# Altium PCB MT-CHARHER  V1.0.0.PcbDoc (part 2 of 2)
Units mm, origin at the board's own origin, x right, y up, seen from the top; angles counter-clockwise.
Board outline 160.02 x 112.01 mm, 2 copper layers (Top Layer, Bottom Layer); 298 components, 195 nets, 918 pads, 681 vias.
Unrouted connection lines stored in the file: 1.
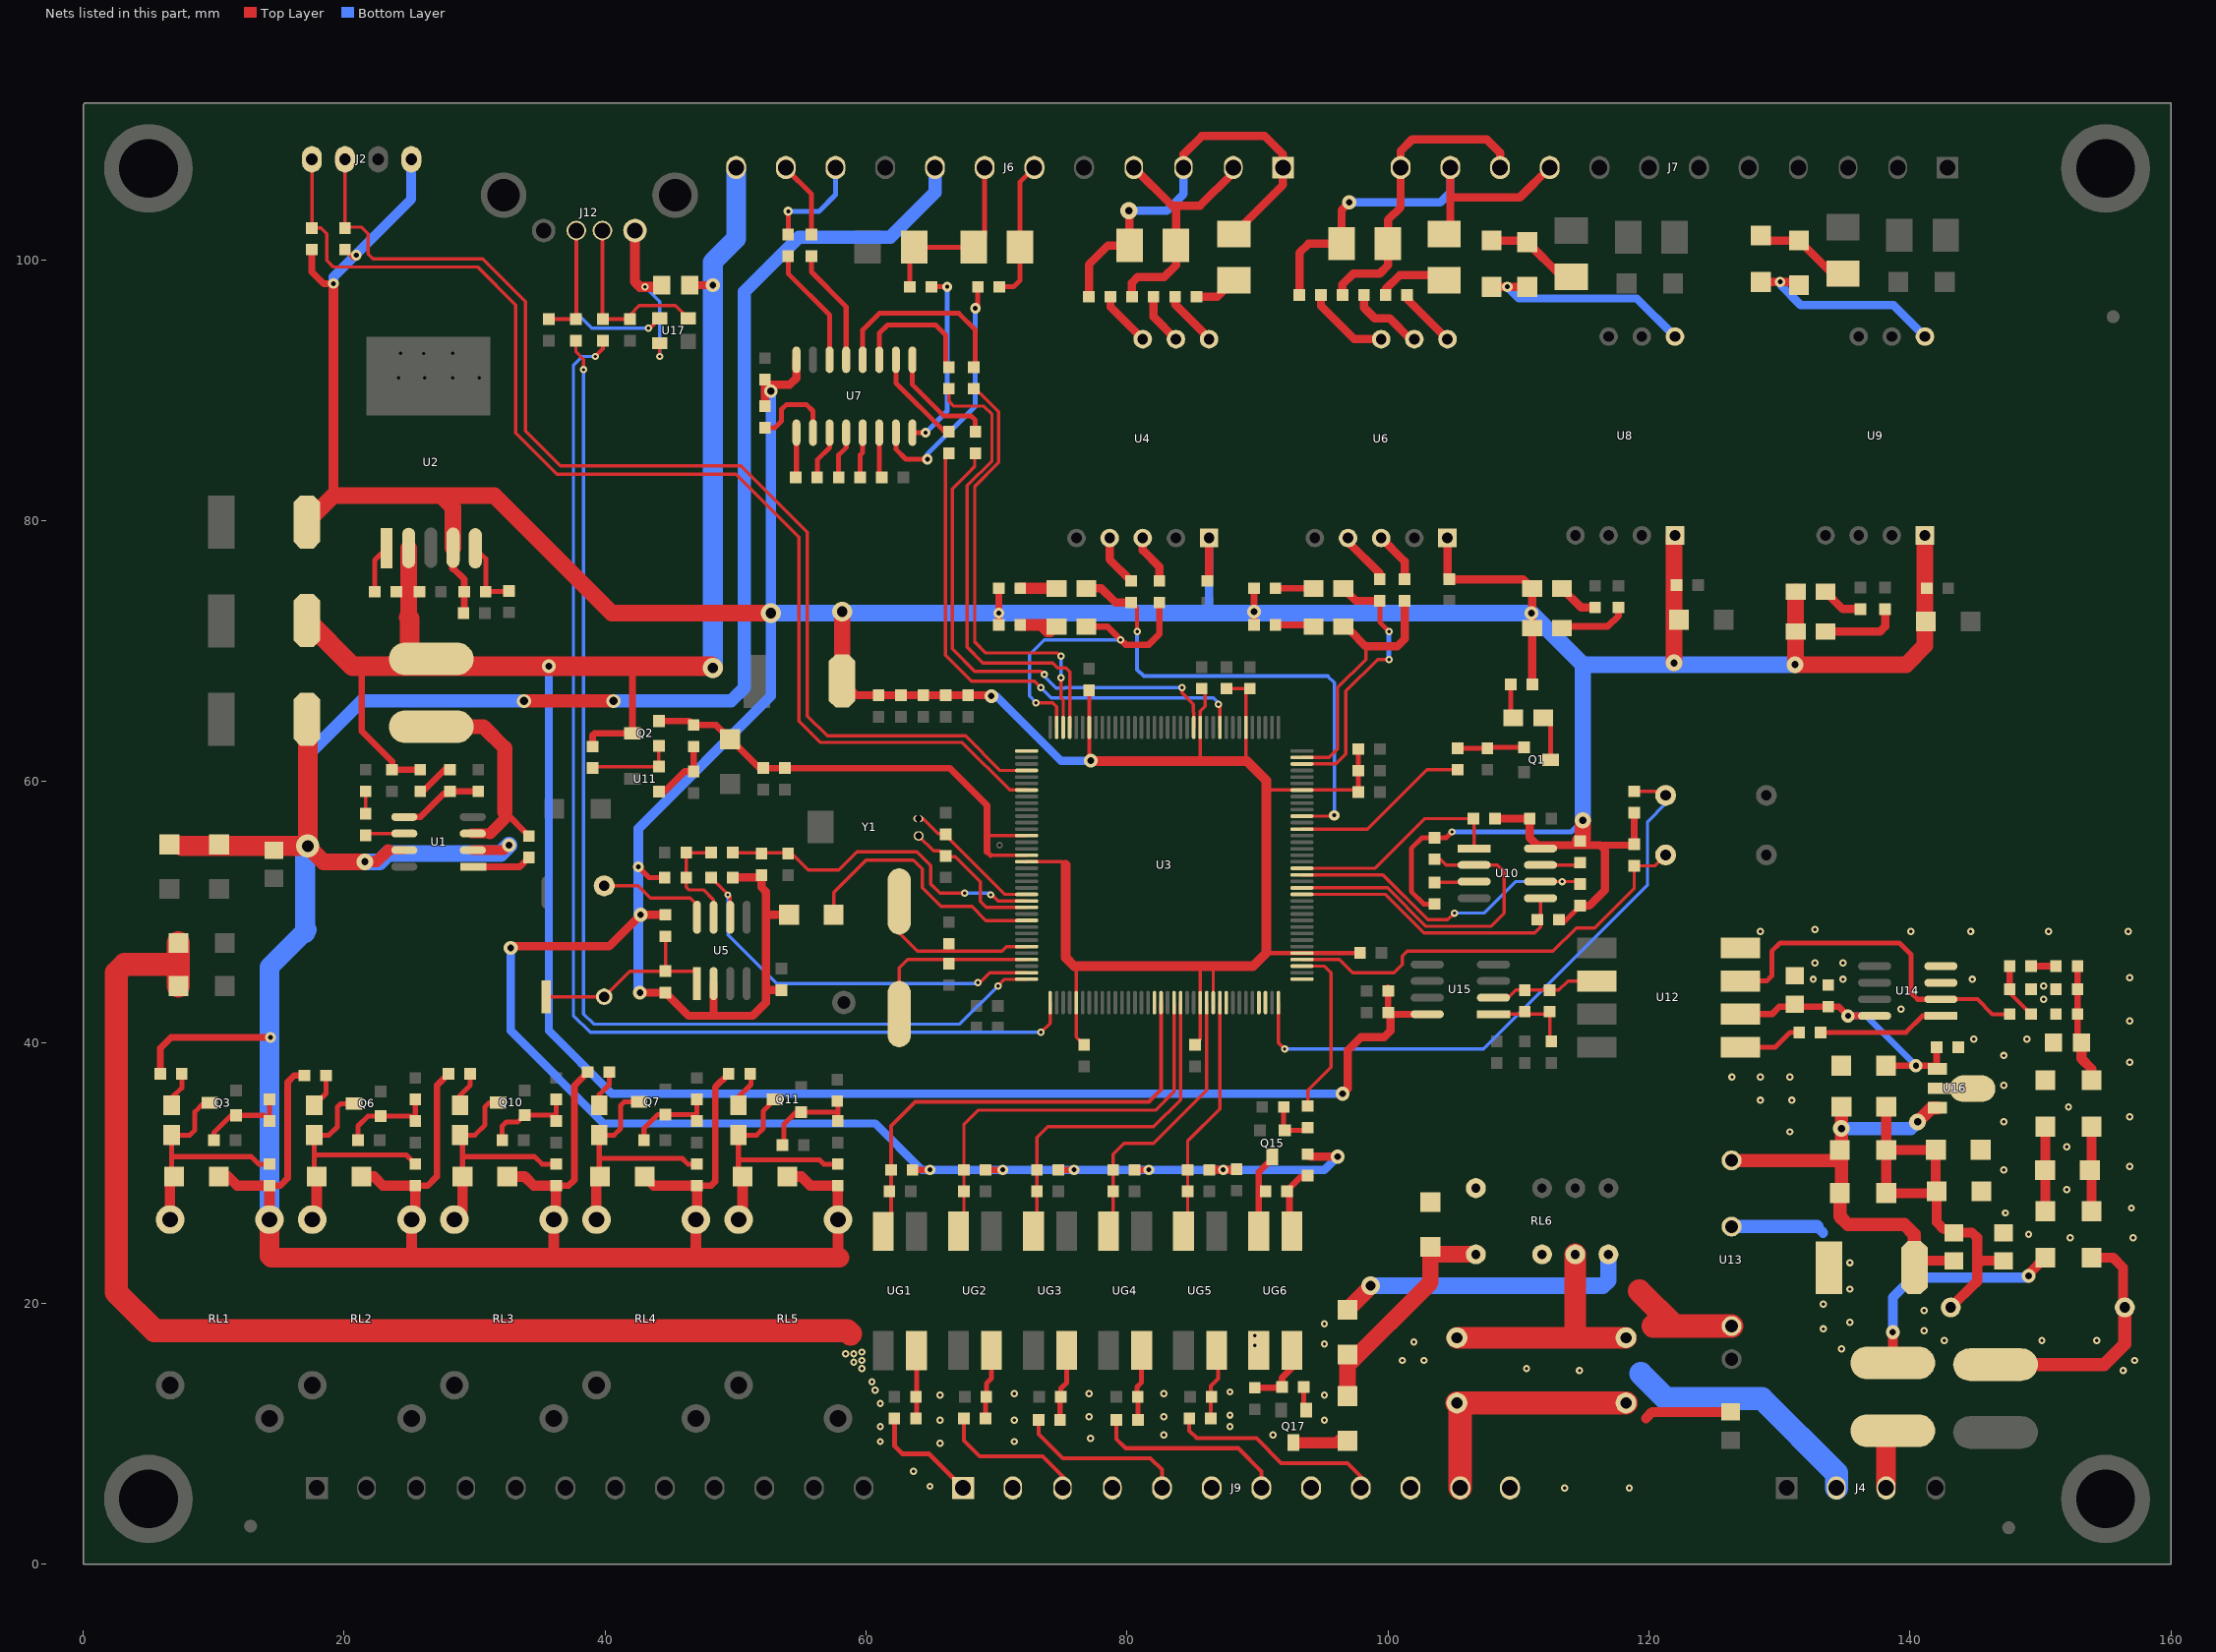
[diagram p2: the nets of this part, all layers, seen from the top]

## Via types
v1: diameter 0.559, hole 0.254, Top Layer to Bottom Layer, 618 vias
v2: diameter 0.813, hole 0.381, Top Layer to Bottom Layer, 19 vias
v3: diameter 1.067, hole 0.508, Top Layer to Bottom Layer, 16 vias
v4: diameter 0.762, hole 0.305, Top Layer to Bottom Layer, 7 vias
v5: diameter 1.27, hole 0.559, Top Layer to Bottom Layer, 6 vias
v6: diameter 1.524, hole 0.813, Top Layer to Bottom Layer, 2 vias
v7: diameter 1.016, hole 0.457, Top Layer to Bottom Layer, 2 vias
v8: diameter 1.067, hole 0.635, Top Layer to Bottom Layer, 2 vias
v9: diameter 1.778, hole 0.914, Top Layer to Bottom Layer, 1 vias
v10: diameter 1.575, hole 0.762, Top Layer to Bottom Layer, 1 vias
v11: diameter 1.016, hole 0.559, Top Layer to Bottom Layer, 1 vias
v12: diameter 1.321, hole 0.711, Top Layer to Bottom Layer, 1 vias
v13: diameter 1.829, hole 1.016, Top Layer to Bottom Layer, 1 vias
v14: diameter 1.422, hole 0.762, Top Layer to Bottom Layer, 1 vias
v15: diameter 0.711, hole 0.305, Top Layer to Bottom Layer, 1 vias
v16: diameter 1.321, hole 0.559, Top Layer to Bottom Layer, 1 vias
v17: diameter 0.813, hole 0.305, Top Layer to Bottom Layer, 1 vias

## Nets (pads, with @x,y where several pads share a name; then routed paths per layer and width w, separated by ;. In a path a pad name is that pad's centre, name@x,y a point inside that pad or via, vN(x,y) a via of type N, cw(c..) or ccw(c..) an arc to the next point about the centre after c; other vN are vias at no path point) (continued)
DP3V3: C1.1 C2.1 C3.1 C4.1 C5.1 C6.1 C7.1 C8.1 C9.1 C10.1 C11.1 C12.2 C13.1 C14.1 C15.1 C16.1 C22.1 C23.1 C24.1 C25.1 C26.1 C32.2 C33.2 C34.1 C35.1 C39.1 C40.2 C41.1 D7.1 D8.1 D9.1 D10.1 D11.1 DC9.1 DC10.1 J2.4 R3.2 R8.2 R9.2 R15.2 R16.2 R18.2 R19.1 R20.1 R21.1 R22.2 R23.2 R30.2 R31.2 R47.1 R48.1 R49.1 R50.1 R52.1 R54.1 R59.2 R66.1 R67.1 R91.1 R92.1 R113.1 R129.1 U2.4 U3.18 U3.41 U3.60 U3.62 U3.77 U3.102 U3.114 U3.121 U3.138 U4.1 U5.2 U6.1 U7.16 U8.1 U9.1 U10.8 | length 601.6
  Top Layer w0.254: U3.18@72.276,53.814 U3.18@72.306,53.844 75.061,53.844 75.311,53.594 ; 75.946,45.847 76.106,45.687 U3.41@76.106,43.044 76.106,40.417 C11.1@76.708,39.814 ; C15.1@85.217,39.814 85.606,40.204 U3.60@85.606,43.044 85.606,45.839 85.598,45.847 ; 85.598,61.561 85.606,61.569 U3.121@85.606,64.144 85.606,65.397 85.979,65.77 85.979,66.865 C7.1@85.725,67.12 ; U3.62@86.606,43.044 86.606,45.839 86.614,45.847 ; C8.1@87.63,67.12 C9.1@89.408,67.12 89.106,66.818 U3.114@89.106,64.144 89.106,61.643 89.188,61.561 ; 90.678,59.436 90.77,59.344 U3.102@93.406,59.344 97.564,59.344 C14.1@97.727,59.182
  Top Layer w0.305: C6.1@77.089,66.739 77.106,66.722 U3.138@77.106,64.144 v3@77.106,61.595 ; 90.678,46.863 90.697,46.844 U3.77@93.406,46.844 C10.1@98.14,46.844
  Top Layer w0.381: R31.2@20.066,100.774 20.701,100.139 20.714,100.139 v2(20.93,100.355) ; v2(42.545,53.467) 43.375,52.637 R20.1@44.565,52.637 ; C14.1@97.727,59.182 C13.1@97.727,60.833 C12.2@97.727,62.484 ; R54.1@103.557,50.609 102.731,50.609 101.779,51.562 101.779,54.864 102.604,55.689 R50.1@103.557,55.689 104.457,55.689 v1(104.902,56.134) ; R49.1@113.347,49.149 113.399,49.149 R48.1@114.733,50.482
  Top Layer w0.508: R30.2@17.526,100.774 17.526,99.06 18.426,98.16 v2@19.166,98.16 ; 28.348,76.352 29.198,75.501 R3.2@29.198,74.549 C22.1@29.198,72.95 ; R66.1@63.563,30.226 v2(64.897,30.226) ; R67.1@69.151,30.226 v2(70.485,30.226) ; R9.2@70.168,72.009 v2(70.168,72.898) R8.2@70.168,74.803 ; R91.1@74.739,30.226 v2(75.946,30.226) ; R92.1@80.581,30.226 v2(81.661,30.226) ; R23.2@89.725,72.009 v3(89.725,73.025) R22.2@89.725,74.803 ; 116.257,55.118 118.808,55.118 R15.2@118.872,55.181 R59.2@118.872,57.594
  Top Layer w0.635: 28.348,76.352 U2.4@28.348,77.923 ; C22.1@29.146,72.898 C22.1@29.198,72.95 ; v3@32.893,47.371 40.311,47.371 v3(42.724,49.784) 42.728,49.78 R18.2@44.629,49.78 ; v3@42.597,43.815 42.601,43.811 C24.1@44.629,43.811 46.403,42.037 48.312,42.037 ; R20.1@44.498,52.705 R20.1@44.565,52.637 ; U5.2@48.312,44.509 48.312,42.037 ; R19.1@49.772,52.637 51.804,52.637 R21.1@51.995,52.828 51.995,51.88 52.324,51.55 52.324,49.784 ; C32.2@52.249,88.773 52.249,89.662 52.249,90.297 52.376,90.424 54.154,90.424 54.662,90.932 U7.16@54.662,92.329 ; 52.376,43.942 52.439,44.005 C25.1@53.519,44.005 ; D9.1@54.09,49.784 52.324,49.784 ; DC10.1@58.166,67.702 59.257,66.611 C1.1@60.96,66.611 C2.1@62.674,66.611 C3.1@64.389,66.611 C4.1@66.103,66.611 C5.1@67.818,66.611 69.532,66.611 v3(69.596,66.548) ; C23.1@86.158,75.374 86.285,75.501 U4.1@86.285,78.664 ; R113.1@86.296,30.226 v2(87.376,30.226) 88.328,30.226 C16.1@88.392,30.29 ; R129.1@93.853,31.432 94.043,31.242 v3(96.139,31.242) ; U6.1@104.556,78.664 104.556,75.645 C26.1@104.7,75.501 108.446,75.501 110.351,75.501 D7.1@111.05,74.803 D8.1@111.05,71.755 111.05,67.449 R16.2@111.061,67.437 ; R52.1@108.192,57.15 C41.1@110.859,57.15 110.859,55.689 U10.8@111.431,55.118 ; U10.8@111.685,54.864 U10.8@111.431,55.118 ; R48.1@114.733,50.482 115.431,50.482 116.638,51.689 116.638,54.737 116.257,55.118 U10.8@111.431,55.118 ; 48.312,42.037 51.308,42.037 52.324,43.053 52.324,49.784
  Top Layer w0.762: 19.166,81.915 v2@19.166,98.16 ; 75.311,53.594 75.311,46.482 75.946,45.847 85.598,45.847 86.614,45.847 89.662,45.847 90.678,46.863 90.678,59.436 90.678,60.071 89.188,61.561 85.598,61.561 v3@77.216,61.561
  Top Layer w1.27: DC9.1@17.145,79.894 19.166,81.915 27.432,81.915 ; U2.4@28.348,77.923 28.348,81.026 28.321,81.026 27.432,81.915 ; v6(52.705,72.898) 40.513,72.898 31.496,81.915 27.432,81.915 ; DC10.1@58.166,67.702 v6(58.166,73.025) ; R47.1@114.733,55.435 114.935,55.638 v5(114.935,57.023) ; v5(121.92,69.088) 121.92,78.798 U8.1@121.989,78.867 ; D10.1@131.243,74.549 131.243,69.013 v5(131.191,68.961) 139.7,68.961 141.149,70.41 U9.1@141.149,78.867
  Bottom Layer w0.381: v1(104.902,56.134) 114.046,56.134 v5(114.935,57.023)
  Bottom Layer w0.635: v3(32.766,47.244) 32.766,40.894 39.878,33.782 60.706,33.782 64.262,30.226 v2(64.897,30.226) v2(70.485,30.226) v2(75.946,30.226) v2(81.661,30.226) v2(87.376,30.226) 95.123,30.226 v3(96.139,31.242) ; v3(69.596,66.548) 69.977,66.548 74.93,61.595 v3(77.216,61.595) ; 86.233,72.898 86.285,72.95 U4.1@86.285,78.664
  Bottom Layer w0.762: v2(19.177,98.171) 19.177,98.679 25.146,104.648 J2.4@25.146,107.696 ; v3(42.672,43.815) 42.545,43.942 v2(42.545,53.467) 42.545,56.388 52.705,66.548 v6(52.705,72.898) v11@52.705,89.789
  Bottom Layer w1.27: v6(52.705,72.898) v2(70.168,72.898) 86.233,72.898 v3(110.998,72.898) 114.935,68.961 ; v5(114.935,57.023) 114.935,68.961 ; v5(131.191,68.961) 114.935,68.961
  other v11: 52.705,89.916
EL1+: DC7.2 DC8.2 J9.11 | length 19.6
  Top Layer w1.8: J9.11@105.537,5.842 105.537,12.105 DC7.2@105.283,12.359 DC8.2@118.237,12.359
FG: J4.3 L7.1 | length 4.6
  Top Layer w1.524: J4.3@138.176,5.842 L7.1@138.176,9.719
  Top Layer w2.032: L7.1@138.176,9.719 L7.1@138.684,10.227
FRAM_CS: R52.2 U3.90 U10.1 | length 17
  Top Layer w0.254: U3.90@93.406,53.344 98.989,53.344 102.795,57.15 R52.2@106.541,57.15 106.605,57.087 U10.1@106.605,54.864
FRAM_MISO: R50.2 U3.87 U10.2 | length 26
  Top Layer w0.254: U3.87@93.406,51.844 99.961,51.844 102.91,48.895 107.875,48.895 108.891,49.911 108.891,53.086 108.383,53.594 U10.2@106.605,53.594 104.446,53.594 104.001,54.038 R50.2@103.557,54.038
FRAM_MOSI: R49.2 U3.86 U10.5 | length 21.9
  Top Layer w0.254: U3.86@93.406,51.344 99.815,51.344 102.772,48.387 111.24,48.387 111.621,48.768 111.685,48.831 U10.5@111.685,51.054
FRAM_SCK: R48.2 U3.89 U10.6 | length 25.7
  Top Layer w0.254: U3.89@93.406,52.844 99.608,52.844 103.049,49.403 104.573,49.403 v1(105.081,49.911) ; U10.6@111.685,52.324 v1(113.336,52.324) 114.542,52.324 R48.2@114.733,52.133
  Bottom Layer w0.254: v1(105.081,49.911) 107.367,49.911 109.78,52.324 v1(113.336,52.324)
FV5V: C69.2 C70.1 C78.2 DC5.1 U12.2 U14.8 U16.1 | length 22.8
  Top Layer w0.508: U12.2@127,42.164 129.413,42.164 129.984,42.735 C69.2@133.731,42.735 134.556,42.735 v7(135.255,42.037) 135.261,42.031 U14.8@137.293,42.031 ; DC5.1@138.174,38.215 v7(140.462,38.215) 141.91,38.215 142.049,38.354 C70.1@142.049,39.624
  Bottom Layer w0.508: v7(135.255,42.037) 136.64,42.037 v7(140.462,38.215)
FV11: C55.1 C71.2 DC3.2 DC4.1 R64.2 R73.2 R74.2 Z1.2 | length 30.5
  Top Layer w0.762: DC3.2@138.184,35.058 R74.2@138.184,31.749 ; Z1.2@141.975,28.65 141.975,31.749 R74.2@138.184,31.749 ; 142.604,25.671 142.049,26.226 Z1.2@142.049,28.575 141.921,28.447 R73.2@138.184,28.447 R74.2@138.184,31.749 ; R64.2@143.256,19.685 R64.2@143.129,19.685 145.034,21.59 145.097,21.59 145.161,21.653 145.161,25.019 144.765,25.415 C55.1@143.366,25.415 ; 145.542,23.241 145.557,23.256 C71.2@147.176,23.256
FV12: C55.2 DC3.1 DC11.1 R73.1 R74.1 U13.7 U16.3 | length 37
  Top Layer w0.762: R73.1@134.628,28.447 R73.1@134.749,28.568 ; 134.655,30.955 134.749,30.861 ; DC11.1@140.335,22.744 140.847,23.256 C55.2@143.366,23.256
  Top Layer w1.016: U13.7@126.33,30.955 134.655,30.955 ; R73.1@134.628,28.447 134.628,26.662 135.255,26.035 139.573,26.035 140.335,25.273 DC11.1@140.335,22.744 ; R73.1@134.749,28.568 134.749,30.861 DC3.1@134.749,35.064 ; v5(140.589,33.909) 141.659,34.979 U16.3@142.119,34.979
  Bottom Layer w1.016: v5(134.747,33.401) 140.081,33.401 v5(140.589,33.909)
FVGND: C58.1 C59.2 C60.2 C69.1 C70.2 C71.1 C78.1 DC4.2 DC5.2 DC11.2 L8.2 R81.1 U12.4 U13.5 U14.3 U14.4 U16.2 Z1.1 | length 7.2
  Bottom Layer w0.762: 132.875,25.875 133.35,25.4
  Bottom Layer w1.016: U13.5@126.33,25.875 132.875,25.875
  other v1: 156.337,14.859 157.226,15.621 134.747,16.51 142.621,17.145 150.114,17.145 154.305,17.145 141.097,17.907 133.35,18.034 135.382,18.542 141.097,19.431 133.35,19.939 135.382,21.082 135.382,23.114 152.273,25.019 157.099,25.019 149.098,25.273 147.32,26.924 156.972,27.305 152.019,28.702 147.193,30.226 156.845,30.48 152.019,32.004 130.81,33.147 147.193,33.909 156.845,34.29 152.146,35.052 128.524,35.56 130.937,35.56 147.193,36.703 126.365,37.338 128.524,37.338 130.81,37.338 156.845,38.481 147.193,38.989 144.907,40.259 148.971,40.259 156.845,41.656 139.319,42.545 150.241,43.307 150.241,44.323 132.588,44.831 134.874,44.831 144.78,44.831 156.845,44.958 132.715,46.101 134.874,46.101 128.524,48.514 140.081,48.514 144.653,48.514 150.622,48.514 156.718,48.514 132.715,48.641
in-ad1: R70.2 U12.3 U14.2 | length 26.9
  Top Layer w0.305: U14.2@142.373,43.301 142.379,43.307 145.161,43.307 146.304,42.164 R70.2@147.637,42.164
  Top Layer w0.381: U12.3@127,44.704 129.032,44.704 129.413,45.085 129.413,46.99 130.048,47.625 139.192,47.625 140.081,46.736 140.081,43.815 140.595,43.301 U14.2@142.373,43.301
ISP: R15.1 SW2.2 U3.76 | length 33.4
  Top Layer w0.254: U3.76@93.406,46.344 96.277,46.344 97.282,45.339 100.457,45.339 101.098,45.98 101.098,46.609 101.476,46.987 112.646,46.987 114.427,48.768 115.824,48.768 118.872,51.816 R15.1@118.872,53.53 120.443,53.53 SW2.2@121.279,54.367
Lock1: R133.1 U3.75 | length 13.4
  Top Layer w0.254: U3.75@93.406,45.844 95.126,45.844 95.631,45.339 95.631,38.1 93.853,36.322 R133.1@93.853,35.115
LOCK2: U3.73
MODE1: R59.1 SW4.2 U3.72 | length 46.7
  Top Layer w0.254: U3.72@91.606,43.044 91.606,39.966 v1(92.075,39.497) ; R59.1@118.872,59.245 120.973,59.245 SW4.2@121.279,58.939
  Bottom Layer w0.254: v1(92.075,39.497) 107.315,39.497 119.888,52.07 119.888,56.896 121.279,58.287 SW4.2@121.279,58.939
NCT-IN1: C62.1 R66.2 U3.54 UG1.4 | length 36.8
  Top Layer w0.305: UG1.4@61.322,25.512 61.912,26.102 R66.2@61.912,30.226 61.912,33.591 63.779,35.458 81.686,35.458 82.606,36.378 U3.54@82.606,43.044
NCT-IN2: C64.1 R67.2 U3.56 UG2.4 | length 32.3
  Top Layer w0.254: UG2.4@67.075,25.527 67.501,25.953 R67.2@67.501,30.226 67.501,33.718 68.58,34.798 82.169,34.798 83.606,36.235 U3.56@83.606,43.044
NCT-IN3: C81.1 R91.2 U3.57 UG3.4 | length 27
  Top Layer w0.254: UG3.4@72.827,25.527 73.088,25.789 R91.2@73.088,30.226 73.088,32.703 73.914,33.528 82.042,33.528 84.106,35.592 U3.57@84.106,43.044
NCT-IN4: C83.1 R92.2 U3.61 UG4.4 | length 22
  Top Layer w0.254: UG4.4@78.579,25.527 78.93,25.878 78.93,30.353 78.93,31.432 79.756,32.258 82.042,32.258 86.106,36.322 U3.61@86.106,43.044
NCT-IN5: C98.1 R113.2 U3.63 UG5.4 | length 18.7
  Top Layer w0.254: UG5.4@84.332,25.527 84.645,25.841 84.645,30.353 84.645,32.448 87.106,34.909 U3.63@87.106,43.044
NCT-IN6: U3.64
NetC17_2: C17.2 U1.1 | length 4.7
  Top Layer w0.508: U1.1@29.77,53.467 32.754,53.467 33.465,53.467 C17.2@34.163,54.165
NetC21_1: C21.1 U1.6 | length 3.1
  Top Layer w0.254: C21.1@21.642,55.88 21.769,56.007 U1.6@24.69,56.007
NetC21_2: C21.2 R7.1 | length 1.7
  Top Layer w0.254: C21.2@21.642,57.531 R7.1@21.642,59.245
NetC24_2: C24.2 R18.1 SW1.1 SW3.1 U5.1 | length 15.8
  Top Layer w0.254: SW3.1@35.485,43.494 39.922,43.494 SW1.1@39.93,43.502 41.89,45.462 C24.2@44.629,45.462 ; R18.1@44.629,48.129 C24.2@44.629,45.462 ; U5.1@47.042,44.509 47.042,45.212 46.793,45.462 C24.2@44.629,45.462
NetC27_2: C27.2 R20.2 R27.1 U5.7 | length 8.4
  Top Layer w0.254: R27.1@48.121,54.542 C27.2@46.216,54.542 R20.2@46.216,52.637 46.216,51.88 46.407,51.689 47.55,51.689 48.312,50.927 U5.7@48.312,49.589
NetC30_1: C30.1 R36.1 TVS5.1 | length 7.2
  Top Layer w0.635: R36.1@107.938,101.473 110.542,101.473 C30.1@110.669,101.346 113.338,98.677 TVS5.1@113.965,98.677
NetC30_2: C30.2 R36.2 U8.8 | length 17.2
  Top Layer w0.635: R36.2@107.938,97.917 v2(109.145,97.917) C30.2@110.669,97.917
  Bottom Layer w0.635: v2(109.145,97.917) 110.034,97.028 119.068,97.028 U8.8@121.989,94.107
NetC31_1: C31.1 U7.3 | length 3.8
  Top Layer w0.381: C31.1@56.249,83.312 56.249,84.645 57.202,85.598 U7.3@57.202,86.741
NetC31_2: C31.2 U7.1 | length 3.5
  Top Layer w0.381: C31.2@54.598,83.312 54.662,83.376 U7.1@54.662,86.741
NetC32_1: C32.1 U7.2 | length 6.8
  Top Layer w0.381: C32.1@52.249,87.122 53.011,87.122 53.519,87.63 53.519,88.519 53.9,88.9 55.424,88.9 55.932,88.392 U7.2@55.932,86.741
NetC36_1: C36.1 U7.5 | length 3.5
  Top Layer w0.381: C36.1@59.551,83.312 59.551,85.026 59.742,85.217 U7.5@59.742,86.741
NetC36_2: C36.2 U7.4 | length 3.7
  Top Layer w0.381: C36.2@57.9,83.312 57.9,85.026 58.472,85.598 U7.4@58.472,86.741
NetC37_2: C37.2 U7.6 | length 3.5
  Top Layer w0.381: U7.6@61.012,86.741 61.012,83.502 C37.2@61.202,83.312
NetC38_1: C38.1 R46.1 U9.8 | length 15.7
  Top Layer w0.635: R46.1@128.576,98.298 131.243,98.298 C38.1@131.497,98.044
  Bottom Layer w0.635: v2@130.1,98.044 131.624,96.52 138.736,96.52 U9.8@141.149,94.107
  other v2: 130.048,98.298
NetC38_2: C38.2 R46.2 TVS10.1 | length 7.5
  Top Layer w0.635: R46.2@128.576,101.854 128.957,101.473 C38.2@131.497,101.473 134.295,98.675 TVS10.1@134.786,98.675
NetC49_2: C49.2 D12.1 LED2.2 Q3.2 RL1.1 | length 19
  Top Layer w0.381: D12.1@6.656,29.4 6.783,29.527 6.783,31.242 ; Q3.2@9.695,35.37 9.26,35.37 8.561,34.671 8.561,33.274 8.178,32.891 LED2.2@6.783,32.891 6.783,31.242 ; C49.2@14.276,30.67 13.45,30.67 12.879,31.242 6.783,31.242
  Top Layer w0.8: RL1.1@6.656,26.416 D12.1@6.656,29.4
NetC52_1: C52.1 D15.1 LED5.2 Q6.2 RL2.1 | length 19.7
  Top Layer w0.381: D15.1@17.895,29.718 17.705,29.909 17.705,31.242 ; Q6.2@20.753,35.306 19.737,35.306 19.483,35.052 19.483,33.528 18.846,32.891 LED5.2@17.705,32.891 17.705,31.242 ; C52.1@25.452,30.67 24.753,31.369 17.832,31.369 17.705,31.242
  Top Layer w0.8: RL2.1@17.55,26.416 17.895,26.762 D15.1@17.895,29.718
NetC53_1: C53.1 R76.1 R86.1 U15.1 | length 6.9
  Top Layer w0.254: U15.1@107.829,42.158 112.198,42.158 C53.1@112.395,42.355 R86.1@112.395,40.069
NetC53_2: C53.2 R76.2 U12.6 U15.2 | length 8.7
  Top Layer w0.254: U15.2@107.829,43.428 109.214,43.428 109.791,44.005 R76.2@110.49,44.005 C53.2@112.395,44.005 113.093,44.005 113.792,44.704 U12.6@116,44.704
NetC56_1: C56.1 L6.1 R75.2 | length 6.5
  Top Layer w0.762: R75.2@153.925,27.059 L6.1@153.925,33.536
NetC56_2: C56.2 L8.1 R87.2 | length 6.5
  Top Layer w0.762: R87.2@150.369,27.059 L8.1@150.369,33.536
NetC58_2: C58.2 C59.1 C60.1 L6.2 R68.1 | length 9.2
  Top Layer w0.508: R68.1@152.844,45.847 C59.1@152.844,44.069 C60.1@152.844,42.164 152.844,40.291 C58.2@153.147,39.988
  Top Layer w0.762: C58.2@153.147,39.988 153.147,38.75 153.925,37.972 L6.2@153.925,37.092
NetC61_2: C61.2 R71.2 UG1.2 | length 5.2
  Top Layer w0.381: R71.2@63.817,11.176 63.862,11.221 UG1.2@63.862,16.368
NetC63_2: C63.2 R72.2 UG2.2 | length 5.4
  Top Layer w0.381: R72.2@69.151,11.176 69.151,12.763 C63.2@69.215,12.827 69.215,13.843 69.615,14.243 UG2.2@69.615,16.383
NetC65_1: C65.1 Q3.1 R77.2 R83.2 | length 7.2
  Top Layer w0.381: R83.2@10.021,32.512 10.021,33.084 11.342,34.404 Q3.1@11.727,34.404 13.844,34.404 C65.1@14.276,33.972 R77.2@14.276,35.623
NetC66_2: C66.2 Q6.1 R80.2 R84.2 | length 7.6
  Top Layer w0.381: R84.2@21.07,32.512 21.07,33.591 21.82,34.341 Q6.1@22.785,34.341 25.084,34.341 C66.2@25.452,33.972 R80.2@25.452,35.623
NetC79_2: C79.2 D17.1 LED6.2 Q7.2 RL4.1 | length 19.4
  Top Layer w0.381: D17.1@39.337,29.443 39.549,29.654 39.549,31.115 ; Q7.2@42.597,35.433 41.454,35.433 41.2,35.179 41.2,33.401 40.69,32.891 LED6.2@39.549,32.891 39.549,31.115 ; C79.2@47.042,30.67 46.343,30.67 45.899,31.115 39.549,31.115
  Top Layer w0.8: RL4.1@39.337,26.416 D17.1@39.337,29.443
NetC80_2: C80.2 R89.2 UG3.2 | length 5.5
  Top Layer w0.381: R89.2@74.867,11.049 74.867,12.775 C80.2@74.918,12.827 74.93,12.839 74.93,13.462 75.367,13.899 UG3.2@75.367,16.383
NetC82_2: C82.2 R90.2 UG4.2 | length 5.5
  Top Layer w0.381: R90.2@80.835,11.049 80.835,12.815 C82.2@80.824,12.827 80.772,12.879 80.772,13.589 81.119,13.936 UG4.2@81.119,16.383
NetC86_1: C86.1 D20.1 LED9.2 Q10.2 RL3.1 | length 19
  Top Layer w0.381: D20.1@29.071,29.718 29.071,31.242 ; Q10.2@31.802,35.382 31.116,35.382 30.786,35.052 30.786,33.655 30.022,32.891 LED9.2@28.881,32.891 29.071,32.7 29.071,31.242 ; C86.1@36.247,30.67 35.167,30.67 34.596,31.242 29.071,31.242
  Top Layer w0.8: RL3.1@28.444,26.416 29.071,27.044 D20.1@29.071,29.718
NetC88_1: C88.1 Q7.1 R98.2 R107.2 | length 6.5
  Top Layer w0.381: R107.2@42.978,32.512 42.978,33.401 44.045,34.468 Q7.1@44.629,34.468 46.966,34.468 47.042,34.544 R98.2@47.042,35.623
NetC91_2: C91.2 Q10.1 R102.2 R111.2 | length 6.8
  Top Layer w0.381: R111.2@32.119,32.512 32.119,33.591 32.437,33.909 33.326,33.909 Q10.1@33.834,34.417 36.247,34.417 R102.2@36.247,35.623
NetC97_1: C97.1 R117.2 UG5.2 | length 5.5
  Top Layer w0.305: R117.2@86.423,11.176 86.423,13.652 86.995,14.224 86.995,16.26 UG5.2@86.872,16.383
NetC106_1: C106.1 D21.1 LED10.2 Q11.2 RL5.1 | length 19.2
  Top Layer w0.381: D21.1@50.534,29.718 50.217,30.035 50.217,30.861 ; Q11.2@53.002,35.624 52.122,34.743 52.122,33.401 51.614,32.893 LED10.2@50.217,32.893 50.217,30.861 ; C106.1@57.837,30.67 56.757,30.67 56.44,30.988 50.344,30.988 50.217,30.861
  Top Layer w0.8: RL5.1@50.231,26.416 50.534,26.719 D21.1@50.534,29.718
NetC108_2: C108.2 Q11.1 R123.2 R125.2 | length 7.5
  Top Layer w0.381: R125.2@53.709,32.512 53.709,33.718 54.649,34.658 Q11.1@55.034,34.658 57.824,34.658 57.837,34.671 ; C108.2@57.837,33.972 57.837,34.671 ; R123.2@57.837,35.75 57.837,34.671
NetC110_1: C110.1 Q15.2 UG6.2 | length 6.3
  Top Layer w0.508: UG6.2@90.095,25.654 90.095,30.048 91.289,31.242 Q15.2@91.289,31.496
NetC110_2: C110.2 R129.2 UG6.1 | length 5.2
  Top Layer w0.508: UG6.1@92.635,25.654 92.444,25.845 92.444,28.829 93.27,29.654 R129.2@94.032,29.654
NetD3_1: D3.1 R8.1 | length 2.8
  Top Layer w0.889: R8.1@71.819,74.803 D3.1@74.601,74.803
NetD4_1: D4.1 R9.1 | length 3.4
  Top Layer w0.762: D4.1@74.468,72.009 D4.1@74.603,71.873
  Top Layer w0.889: R9.1@71.819,72.009 73.406,72.009 ; D4.1@74.105,71.514 73.901,71.514 73.406,72.009 ; D4.1@74.105,72.009 73.406,72.009
NetD5_1: D5.1 R22.1 | length 2.9
  Top Layer w0.508: R22.1@91.376,74.803 D5.1@94.286,74.803
NetD6_1: D6.1 R23.1 | length 3
  Top Layer w0.508: R23.1@91.376,72.009 94.153,72.009 D6.1@94.288,71.873
  Top Layer w0.635: D6.1@94.28,71.882 D6.1@94.288,71.873
NetD7_2: D7.2 R41.1 | length 3.1
  Top Layer w0.635: D7.2@113.336,74.803 114.796,73.343 R41.1@115.876,73.343
NetD8_2: D8.2 R38.1 | length 5.4
  Top Layer w0.508: D8.2@113.336,71.755 113.463,71.882 116.84,71.882 117.654,72.696 R38.1@117.654,73.343
NetD9_2: D9.2 U3.27 | length 20.3
  Top Layer w0.254: D9.2@57.519,49.784 57.519,51.498 59.996,53.975 63.044,53.975 63.618,53.975 64.314,53.279 64.314,52.705 64.314,51.86 65.755,50.419 68.114,50.419 69.189,49.344 U3.27@72.306,49.344
NetD10_2: D10.2 R56.1 | length 3.2
  Top Layer w0.635: D10.2@133.529,74.549 134.862,73.215 R56.1@136.196,73.215
NetD11_2: D11.2 R51.1 | length 6.1
  Top Layer w0.635: D11.2@133.531,71.492 137.711,71.492 138.101,71.882 R51.1@138.101,73.215
NetD23_1: D23.1 Q17.2 | length 3.6
  Top Layer w0.762: 95.988,9.311 D23.1@96.266,9.588
  Top Layer w0.889: Q17.2@92.761,9.311 95.988,9.311
NetD23_2: D23.2 D24.1 D27.2 RL6.1 | length 16.6
  Top Layer w1.27: D23.2@96.901,13.144 96.901,15.24 103.251,21.59 103.251,23.495 103.505,23.749 RL6.1@106.732,23.749
NetD24_2: D24.2 RL6.5 | length 23
  Top Layer w1.27: D24.2@96.901,19.494 98.679,21.273 v14(98.679,21.336)
  Bottom Layer w1.27: v14(98.679,21.336) 116.459,21.336 116.892,21.769 RL6.5@116.892,23.749
NetDC7_1: DC7.1 DC8.1 RL6.4 | length 19.4
  Top Layer w1.651: DC7.1@105.283,17.359 114.444,17.359 ; RL6.4@114.352,23.749 114.352,17.451 114.444,17.359 ; DC8.1@118.237,17.359 114.444,17.359
NetF1_2: F1.2 J12.1 U17.4 | length 13
  Top Layer w0.254: U17.4@44.171,93.599 44.171,92.608 v1(44.196,92.583)
  Top Layer w0.762: J12.1@42.291,102.235 42.291,98.298 42.672,97.917 v1(43.053,97.917) 44.196,97.917 F1.2@44.323,98.044
  Bottom Layer w0.254: v1(43.053,97.917) 44.196,96.774 v1(44.196,92.583)
NetJ12_2: J12.2 R216.1 R218.2 U17.2 | length 14.5
  Top Layer w0.254: R218.2@41.91,95.441 41.91,95.783 42.596,96.469 45.39,96.469 46.101,95.758 46.101,95.504 U17.2@46.355,95.504
  Top Layer w0.305: J12.2@39.791,102.235 39.791,95.485 R216.1@39.836,95.441 R218.2@41.91,95.441
NetJ12_3: J12.3 R217.1 R219.2 U17.3 | length 22.4
  Top Layer w0.305: R219.2@35.687,95.441 R217.1@37.761,95.441 37.791,95.47 J12.3@37.791,102.235 ; v1(43.307,94.742) 43.409,94.742 U17.3@44.171,95.504
  Bottom Layer w0.254: J12.3@37.791,102.235 37.791,95.94 38.989,94.742 v1(43.307,94.742)
NetL5_2: L5.2 R64.1 R75.1 | length 19.3
  Top Layer w0.762: R75.1@153.925,23.503 155.567,23.503 156.337,22.733 156.337,20.066 R64.1@156.718,19.685
  Top Layer w1.016: L5.2@146.558,15.3 154.873,15.3 156.464,16.891 R64.1@156.464,19.685
NetL7_2: L7.2 R87.1 | length 18
  Top Layer w0.762: L7.2@138.684,15.427 v3(138.684,17.78) ; v3(149.098,22.098) 149.098,22.232 R87.1@150.369,23.503
  Bottom Layer w0.762: v3(138.684,17.78) 138.684,20.447 140.208,21.971 148.971,21.971 v3(149.098,22.098)
NetLED1_1: LED1.1 R16.1 | length 2.6
  Top Layer w0.381: R16.1@109.41,67.437 109.41,65.081 LED1.1@109.603,64.888
NetLED1_2: LED1.2 Q1.2 | length 3.2
  Top Layer w0.381: Q1.2@112.456,61.658 LED1.2@112.456,64.888
NetLED2_1: LED2.1 R60.1 | length 3
  Top Layer w0.381: LED2.1@6.719,35.24 LED2.1@6.783,35.177 6.783,35.739 7.556,36.512 R60.1@7.556,37.719
NetLED5_1: LED5.1 R62.1 | length 3.2
  Top Layer w0.381: LED5.1@17.705,35.687 LED5.1@17.705,35.177 18.605,36.077 R62.1@18.605,37.465
NetLED6_1: LED6.1 R93.1 | length 2.9
  Top Layer w0.381: LED6.1@39.549,35.177 39.549,35.941 39.549,35.993 40.322,36.767 R93.1@40.322,37.719
NetLED9_1: LED9.1 R96.1 | length 2.7
  Top Layer w0.381: LED9.1@28.881,35.177 28.881,35.941 29.654,36.715 R96.1@29.654,37.592
NetLED10_1: LED10.1 R121.1 | length 2.8
  Top Layer w0.381: LED10.1@50.217,35.179 50.217,35.814 51.169,36.767 51.169,37.54 R121.1@51.117,37.592
NetQ1_1: Q1.1 R29.2 R33.2 | length 5.1
  Top Layer w0.381: R29.2@105.335,62.547 R33.2@107.621,62.547 107.697,62.624 Q1.1@110.424,62.624
NetQ2_1: Q2.1 R55.1 U11.3 | length 6.7
  Top Layer w0.254: R55.1@39.041,61.023 39.155,61.138 U11.3@44.121,61.138 Q2.1@44.121,62.725
NetQ15_1: Q15.1 R133.2 R135.2 | length 3.6
  Top Layer w0.381: Q15.1@92.011,33.341 R135.2@92.011,35.052 ; Q15.1@92.088,33.265 93.654,33.265 R133.2@93.853,33.465
NetQ17_1: Q17.1 R130.2 | length 1.9
  Top Layer w0.381: R130.2@93.535,13.589 93.535,12.002 Q17.1@93.726,11.811
NetR1_1: R1.1 R4.2 | length 3
  Top Layer w0.508: R4.2@25.833,59.245 26.023,59.245 27.674,60.896 R1.1@28.119,60.896
NetR1_2: R1.2 R5.1 U1.5 | length 6.4
  Top Layer w0.508: U1.5@24.69,57.277 25.833,57.277 27.611,59.055 27.928,59.055 R1.2@28.119,59.245 R5.1@30.278,59.245
NetR2_2: R2.2 U2.1 | length 3.7
  Top Layer w0.381: R2.2@22.34,74.549 22.34,75.755 22.34,76.97 U2.1@23.242,77.872
NetR3_1: R3.1 R6.2 U2.5 | length 5.5
  Top Layer w0.381: U2.5@30.049,77.872 30.849,77.072 30.849,76.263 R3.1@30.849,74.549 32.575,74.549 R6.2@32.639,74.612
NetR10_1: R10.1 U4.10 | length 4.3
  Top Layer w0.635: R10.1@83.681,97.155 83.681,96.584 86.285,93.98 U4.10@86.285,93.904
NetR10_2: R10.2 TVS1.1 | length 3.4
  Top Layer w0.635: R10.2@85.332,97.155 86.916,97.155 TVS1.1@88.184,98.423
NetR11_1: R11.1 U4.9 | length 4
  Top Layer w0.635: R11.1@82.03,97.155 82.03,95.618 U4.9@83.745,93.904
NetR12_2: R12.2 U4.3 | length 3.8
  Top Layer w0.635: U4.3@81.205,78.664 81.205,77.724 82.475,76.454 R12.2@82.475,75.374
NetR13_2: R13.2 U4.4 | length 4
  Top Layer w0.635: U4.4@78.665,78.664 78.665,77.025 R13.2@80.316,75.374
NetR14_1: R14.1 U4.8 | length 4.3
  Top Layer w0.635: R14.1@78.728,97.155 78.728,96.38 U4.8@81.205,93.904
NetR24_1: R24.1 U6.10 | length 4.7
  Top Layer w0.635: R24.1@101.461,97.282 101.461,96.998 U6.10@104.556,93.904
NetR24_2: R24.2 TVS3.1 | length 5.6
  Top Layer w0.635: R24.2@99.81,97.282 99.81,97.727 100.89,98.806 103.929,98.806 TVS3.1@104.313,98.423
NetR28_1: R28.1 U6.9 | length 5.8
  Top Layer w0.635: R28.1@98.159,97.282 98.159,96.329 98.985,95.504 100.128,95.504 101.728,93.904 U6.9@102.016,93.904
NetR32_2: R32.2 U6.3 | length 3.9
  Top Layer w0.635: U6.3@99.476,78.664 101.271,76.869 R32.2@101.271,75.501
NetR34_2: R34.2 U6.4 | length 4.2
  Top Layer w0.635: U6.4@96.936,78.664 96.936,78.376 99.366,75.946 R34.2@99.366,75.501
NetR35_1: R35.1 U6.8 | length 6.5
  Top Layer w0.635: R35.1@94.857,97.282 94.857,96.456 97.41,93.904 U6.8@99.476,93.904
NetR37_1: R37.1 U7.8 | length 14.1
  Top Layer w0.381: U7.8@63.552,86.741 v4(64.568,86.741) ; R37.1@65.012,97.917 v4(66.219,97.917)
  Bottom Layer w0.381: v4(64.568,86.741) 66.219,88.392 v4(66.219,97.917)
NetR40_2: R40.2 U7.12 | length 15
  Top Layer w0.381: U7.12@59.742,92.329 59.742,94.615 61.012,95.885 67.108,95.885 68.378,94.615 R40.2@68.378,91.63
NetR42_2: R42.2 U7.9 | length 8.8
  Top Layer w0.381: U7.9@63.552,92.329 63.552,90.424 65.965,88.011 68.06,88.011 68.378,87.694 R42.2@68.378,86.804
NetR43_2: R43.2 U7.11 | length 10.3
  Top Layer w0.381: U7.11@61.012,92.329 61.012,94.361 61.647,94.996 65.33,94.996 66.092,94.234 R43.2@66.092,91.63
NetR44_2: R44.2 U7.10 | length 7.4
  Top Layer w0.381: U7.10@62.282,92.329 62.282,90.551 65.965,86.868 66.346,86.868 R44.2@66.346,86.804
NetR45_1: R45.1 U7.7 | length 18.8
  Top Layer w0.381: U7.7@62.282,86.741 62.282,85.471 63.044,84.709 v2(64.695,84.709) ; v2(68.378,96.266) 68.568,96.456 R45.1@68.568,97.917
  Bottom Layer w0.381: v2(64.695,84.709) 64.695,85.09 68.378,88.773 v2(68.378,96.266)
NetR47_2: R47.2 U10.7 | length 3.1
  Top Layer w0.254: U10.7@111.685,53.594 114.542,53.594 R47.2@114.733,53.785
NetR54_2: R54.2 U10.3 | length 3.1
  Top Layer w0.254: R54.2@103.557,52.261 106.541,52.261 U10.3@106.605,52.324
NetR57_1: R57.1 R58.2 U11.1 | length 5.2
  Top Layer w0.508: U11.1@44.121,59.233 44.553,59.233 46.089,60.77 R58.2@46.788,60.77 R57.1@46.788,62.674
NetR65_1: R65.1 U14.1 | length 9.7
  Top Layer w0.381: R65.1@133.16,40.767 139.7,40.767 140.964,42.031 U14.1@142.373,42.031
NetR65_2: R65.2 U12.1 | length 5
  Top Layer w0.381: U12.1@127,39.624 129.667,39.624 130.81,40.767 R65.2@131.508,40.767
NetR68_2: R68.2 R69.1 | length 1.9
  Top Layer w0.508: R69.1@149.288,45.847 R68.2@151.194,45.847
NetR69_2: R69.2 R70.1 R81.2 | length 4.4
  Top Layer w0.305: R81.2@147.637,44.069 147.637,43.815 R70.1@149.288,42.164
  Top Layer w0.508: R81.2@147.637,44.069 R69.2@147.637,45.847
NetR127_1: R127.1 R130.1 UG6.4 | length 5
  Top Layer w0.508: R127.1@89.789,13.525 91.44,13.525 R130.1@91.63,13.716 ; R130.1@91.885,13.589 91.885,14.287 92.635,15.038 UG6.4@92.635,16.383
NetR138_1: R138.1 U7.13 | length 9
  Top Layer w0.381: R138.1@55.805,100.266 55.805,99.06 58.472,96.393 U7.13@58.472,92.329
NetR139_1: R139.1 U7.14 | length 9.3
  Top Layer w0.381: R139.1@54.027,100.266 54.027,98.933 57.202,95.758 U7.14@57.202,92.329
NetSW1_2: SW1.2 U5.8 | length 8.7
  Top Layer w0.254: SW1.2@39.93,52.002 42.538,52.002 43.486,51.054 46.534,51.054 47.042,50.546 U5.8@47.042,49.589
nRST: C28.2 R21.2 R27.2 U3.24 | length 26.1
  Top Layer w0.254: R27.2@49.772,54.542 53.963,54.542 C28.2@54.027,54.479 54.286,54.479 55.551,53.213 57.912,53.213 59.309,54.61 63.881,54.61 64.949,53.542 64.949,52.123 64.971,52.123 65.659,51.435 v1@67.437,51.435 ; v1(67.564,51.435) v1@67.437,51.435 ; v1@67.564,51.562 v1@67.437,51.435 ; v1@69.775,51.181 70.112,50.844 U3.24@72.306,50.844
  Bottom Layer w0.254: v1@67.743,51.435 69.521,51.435 v1@69.775,51.181
  other v1: 69.546,51.312
RTCK1: C45.1 U3.23 Y1.1 | length 10.7
  Top Layer w0.254: Y1.1@64.003,57.146 64.393,57.146 65.532,56.007 65.965,56.007 70.628,51.344 U3.23@72.306,51.344
RTCK2: C47.1 U3.25 Y1.2 | length 11.4
  Top Layer w0.254: Y1.2@64.028,55.825 65.167,54.686 65.635,54.686 66.092,54.229 66.841,54.229 68.759,52.311 68.759,50.8 69.215,50.344 U3.25@72.306,50.344
RUN: R29.1 U3.96 | length 13.8
  Top Layer w0.254: U3.96@93.406,56.344 98.425,56.344 102.977,60.896 R29.1@105.335,60.896
SGND: C77.2 D27.1 J4.2 J9.2 J9.4 J9.6 J9.8 J9.10 J9.12 L2.1 L3.1 RL6.3 RL6.12 U13.2 UG6.3 | length 126.2
  Top Layer w0.762: 119.761,11.176 120.254,11.669 C77.2@126.255,11.669
  Top Layer w1.778: L2.1@7.299,44.322 7.299,45.974 ; L3.1@7.299,47.624 7.299,45.974 ; 58.801,17.653 58.547,17.907 5.461,17.907 2.54,20.828 2.54,45.339 3.175,45.974 7.299,45.974 ; 119.253,20.955 121.92,18.288 121.92,18.255 ; 120.305,18.255 121.92,18.255 ; U13.2@126.33,18.255 121.92,18.255
  Bottom Layer w1.778: 119.38,14.605 121.285,12.7 128.651,12.7 134.366,6.985 J4.2@134.366,5.842
  other v1: 113.538,5.842 118.491,5.842 64.897,5.969 63.627,7.112 65.659,9.271 61.087,9.398 71.374,9.398 77.216,9.652 82.804,9.906 91.186,9.906 61.087,10.541 87.884,10.541 65.659,11.049 71.374,11.049 95.123,11.049 77.089,11.303 82.804,11.303 87.884,11.43 61.087,12.319 65.659,12.954 95.123,12.954 71.374,13.081 77.089,13.081 82.804,13.081 87.884,13.208 60.706,13.335 60.452,13.97 114.681,14.859 59.69,14.986 110.617,14.986 59.055,15.494 59.69,15.621 101.092,15.621 102.743,15.621 58.42,16.129 59.055,16.129 59.69,16.256 89.789,16.764 95.123,16.891 101.981,17.018 89.789,17.526 95.123,18.415
STOP_TEST: U3.53
sw0: C17.1 L1.1 U1.3 | length 17.4
  Top Layer w0.508: 32.31,57.658 32.322,57.658 C17.1@34.163,55.816
  Top Layer w0.762: U1.3@29.77,56.007 31.167,56.007
  Top Layer w0.889: 31.167,56.007 32.31,57.15 32.31,57.658
  Top Layer w1.143: L1.1@26.67,64.202 30.667,64.202 32.31,62.559 32.31,57.658
TCK: J2.1 R30.1 U3.7 | length 93.1
  Top Layer w0.254: J2.1@17.526,107.696 R30.1@17.526,102.425 18.224,102.426 18.669,101.981 18.669,99.949 19.177,99.441 30.226,99.441 33.147,96.52 33.147,86.732 36.313,83.566 50.038,83.566 54.864,78.74 54.864,64.643 56.515,62.992 67.362,62.992 71.01,59.344 U3.7@72.306,59.344
TDO: U3.1
TMS: J2.2 R31.1 U3.4 | length 89.7
  Top Layer w0.254: J2.2@20.066,107.696 R31.1@20.066,102.425 20.13,102.489 21.336,102.489 21.844,101.981 21.844,100.457 22.225,100.076 30.607,100.076 33.909,96.774 33.909,86.868 36.576,84.201 50.419,84.201 55.499,79.121 55.499,65.024 57.023,63.5 67.616,63.5 70.272,60.844 U3.4@72.306,60.844
U0-RX: J6.11 R138.2 | length 6
  Top Layer w0.381: J6.11@53.848,107.061 53.848,106.986 55.805,105.029 R138.2@55.805,101.917
U0-RXD: R40.1 U3.142 | length 33.6
  Top Layer w0.254: R40.1@68.251,90.106 68.398,90.106 70.156,88.348 70.156,84.443 68.326,82.613 68.326,70.693 69.169,69.85 74.676,69.85 v1(74.93,69.596) ; v1(74.93,67.945) 74.93,66.421 75.106,66.245 U3.142@75.106,64.144
  Bottom Layer w0.254: v1(74.93,67.945) v1(74.93,69.596)
U0-TX: J6.10 R139.2 | length 8
  Top Layer w0.381: R139.2@54.027,101.917 v15(54.027,103.707)
  Bottom Layer w0.381: v15(54.027,103.707) 56.388,103.707 57.658,104.977 J6.10@57.658,107.061
U0-TXD: R43.1 U3.141 | length 36.2
  Top Layer w0.254: R43.1@66.346,90.106 66.346,89.154 66.727,88.773 69.013,88.773 69.648,88.138 69.648,84.582 67.743,82.677 67.743,70.306 68.961,69.088 74.295,69.088 74.676,68.707 75.311,68.707 75.606,68.412 U3.141@75.606,64.144
U1-RX: J6.7 R37.2 TVS6.2 TVS8.2 | length 14
  Top Layer w0.381: R37.2@63.361,97.917 63.361,100.266 64.06,100.965 68.247,100.965 TVS8.2@68.253,100.959 69.088,101.793 J6.7@69.088,107.061
U1-TX: J6.6 R45.2 TVS8.1 | length 10.9
  Top Layer w0.381: R45.2@70.219,97.917 71.299,97.917 71.809,98.427 TVS8.1@71.809,100.959 71.809,105.972 J6.6@72.898,107.061
U1_RXD: D5.2 R34.1 U3.106 | length 20.8
  Top Layer w0.254: U3.106@93.406,61.344 96.009,61.344 96.774,62.109 96.774,66.92 99.196,69.342 v1(100.076,69.342)
  Top Layer w0.381: R34.1@99.366,73.85 99.366,72.211 v1(100.076,71.501)
  Top Layer w0.635: D5.2@96.572,74.803 97.524,73.85 98.35,73.85 R34.1@99.366,73.85
  Bottom Layer w0.381: v1(100.076,69.342) v1(100.076,71.501)
U1_TXD: D6.2 R32.1 U3.107 | length 20.4
  Top Layer w0.254: U3.107@93.406,61.844 95.499,61.844 96.139,62.484 96.139,67.183 98.298,69.342 98.298,70.358
  Top Layer w0.635: D6.2@96.574,71.873 97.032,71.873 97.032,71.624 98.298,70.358 100.711,70.358 101.271,70.918 R32.1@101.271,73.85
U2_RXD: U3.70
U2_TXD: U3.69 | length 0
  Top Layer w0.254: U3.69@90.076,43.014 U3.69@90.106,43.044
U3_485A: J6.2 J6.4 R11.2 TVS2.2 | length 20.7
  Top Layer w0.635: R11.2@80.379,97.155 80.379,98.234 80.824,98.679 82.856,98.679 83.745,99.568 TVS2.2@83.745,101.092 ; J6.4@80.518,107.061 83.439,104.14 ; TVS2.2@84.253,101.6 TVS2.2@83.745,101.092 ; J6.2@88.138,107.061 88.138,106.68 85.598,104.14 83.439,104.14 ; 83.439,104.14 83.745,103.834 TVS2.2@83.745,101.092
U3_485B: J6.1 J6.3 R14.2 TVS1.2 TVS2.1 | length 33.1
  Top Layer w0.635: R14.2@77.077,97.155 77.077,99.632 78.538,101.092 TVS2.1@80.189,101.092 80.189,103.707 v16(80.137,103.759) ; J6.3@84.328,107.061 84.328,108.077 85.725,109.474 90.551,109.474 91.948,108.077 J6.1@91.948,107.061 91.948,105.743 TVS1.2@88.184,101.979
  Bottom Layer w0.635: v16(80.137,103.759) 83.058,103.759 84.328,105.029 J6.3@84.328,107.061
U3_RXD: R42.1 U3.122 | length 38.1
  Top Layer w0.254: R42.1@68.378,85.153 68.326,85.102 68.326,84.149 67.743,83.566 66.6,82.423 66.6,71.097 66.6,70.179 68.326,68.453 73.406,68.453 v1(73.66,68.199) ; v1(84.201,67.183) 84.201,66.802 85.09,65.913 85.09,65.294 85.106,65.278 U3.122@85.106,64.144
  Bottom Layer w0.254: v1(73.66,68.199) 73.66,68.047 74.549,67.158 75.256,67.158 75.282,67.183 v1(84.201,67.183)
U3_TXD: R44.1 U3.118 | length 39.9
  Top Layer w0.254: R44.1@66.346,85.153 66.092,84.9 66.092,82.677 66.092,70.866 66.092,69.671 68.072,67.691 72.898,67.691 v1(73.406,67.183) ; v1(86.995,65.913) 87.106,65.802 U3.118@87.106,64.144
  Bottom Layer w0.254: v1(73.406,67.183) 74.193,66.396 86.639,66.396 86.995,66.04 v1(86.995,65.913)
U4_485A: J7.10 J7.12 R28.2 TVS4.2 | length 23.6
  Top Layer w0.635: R28.2@96.508,97.282 96.508,98.108 97.334,98.933 99.366,98.933 99.999,99.566 TVS4.2@99.999,101.225 99.999,103.047 100.965,104.013 J7.12@100.965,107.061 100.965,108.331 101.854,109.22 107.569,109.22 108.585,108.204 J7.10@108.585,107.061
U4_485B: J7.9 J7.11 R35.2 TVS3.2 TVS4.1 | length 34
  Top Layer w0.635: R35.2@93.206,97.282 93.206,100.52 93.911,101.225 TVS4.1@96.443,101.225 96.443,103.809 v3(97.028,104.394) ; TVS3.2@104.313,101.979 104.775,102.441 104.775,104.775 ; J7.11@104.775,107.061 104.775,104.775 ; J7.9@112.395,107.061 110.109,104.775 104.775,104.775
  Bottom Layer w0.635: v3(97.028,104.394) 104.013,104.394 104.775,105.156 J7.11@104.775,107.061
U4_RXD: D3.2 R13.1 U3.98 | length 37.4
  Top Layer w0.254: U3.98@93.406,57.344 95.825,57.344 v17(95.885,57.404)
  Top Layer w0.305: R13.1@80.316,73.724 80.772,73.267 v1(80.772,71.501)
  Top Layer w0.635: D3.2@76.887,74.803 78.03,74.803 79.109,73.724 R13.1@80.316,73.724
  Bottom Layer w0.254: 95.377,68.072 95.885,67.564 v17(95.885,57.404)
  Bottom Layer w0.305: v1(80.772,71.501) 80.772,68.58 81.28,68.072 95.377,68.072
U4_TXD: D4.2 R12.1 U3.143 | length 23.6
  Top Layer w0.254: v1(73.025,66.04) 74.295,66.04 74.606,65.729 U3.143@74.606,64.144
  Top Layer w0.508: D4.2@76.889,71.873 78.495,71.873 v1(79.502,70.866) 79.883,70.485 81.661,70.485 82.475,71.299 R12.1@82.475,73.724
  Bottom Layer w0.254: v1(73.025,66.04) 72.517,66.548 72.517,69.723 73.66,70.866 v1(79.502,70.866)
USBD2+: R217.2 U3.36 | length 87.6
  Top Layer w0.254: R217.2@37.761,93.789 37.761,92.922 38.354,92.329 v1(38.354,91.567) ; v1(70.104,44.323) 70.612,44.831 72.293,44.831 U3.36@72.306,44.844
  Bottom Layer w0.254: v1(38.354,91.567) 38.354,42.173 39.125,41.402 67.183,41.402 v1(70.104,44.323)
USBD2-: R216.2 U3.37 | length 92.2
  Top Layer w0.254: v1(73.406,40.767) 74.106,41.467 U3.37@74.106,43.044
  Top Layer w0.305: v1(39.243,92.583) 39.836,93.176 R216.2@39.836,93.789
  Bottom Layer w0.254: v1(39.243,92.583) 38.256,92.583 37.567,91.893 37.567,42.062 38.862,40.767 v1(73.406,40.767)
VA3.3: C42.1 C43.1 C44.1 Q2.3 R57.2 U3.14 U3.17 | length 38.1
  Top Layer w0.254: 69.267,55.753 69.358,55.844 U3.14@72.306,55.844 ; 69.533,54.344 U3.17@72.306,54.344
  Top Layer w0.381: 69.267,54.61 69.533,54.344
  Top Layer w0.508: Q2.3@44.121,64.63 46.483,64.63 R57.2@46.788,64.325 48.502,64.325 C44.1@49.582,63.246 ; C44.1@49.899,63.563 C44.1@49.582,63.246 ; 69.267,54.61 69.267,55.753 69.267,57.277 69.267,58.166 66.409,61.023 C43.1@53.773,61.023 C42.1@52.122,61.023 51.804,61.023 C44.1@49.582,63.246
VDD5V: C19.2 C20.2 C75.2 C76.2 DC2.1 F1.1 J6.12 L1.2 Q2.2 R2.1 R4.1 R55.2 U2.2 U15.8 | length 206.8
  Top Layer w0.508: 21.463,68.834 21.336,68.707 21.336,63.881 23.674,61.543 C19.2@23.674,60.896 ; 24.13,60.896 R4.1@25.833,60.896 ; R55.2@39.041,62.674 39.041,63.552 39.18,63.691 Q2.2@42.089,63.691 42.089,68.147 ; C75.2@100.013,44.196 C75.2@100.013,43.942 100.013,42.545 100.4,42.158 U15.8@102.749,42.158
  Top Layer w0.635: F1.1@46.482,98.044 v3(48.26,98.044) ; v3(96.52,36.068) 96.901,36.449 96.901,39.37 97.917,40.386 99.695,40.386 100.203,40.894 100.203,42.1 C76.2@100.013,42.291
  Top Layer w1.27: 24.944,72.569 U2.2@24.944,77.897
  Top Layer w1.524: DC2.1@17.145,72.338 20.649,68.834 21.463,68.834 v3(35.687,68.834) 48.133,68.834 v10(48.26,68.707) ; 24.944,72.569 25.012,72.501 25.012,69.596 25.206,69.402 L1.2@26.67,69.402
  Bottom Layer w0.635: v3(35.687,68.834) 35.687,40.894 40.513,36.068 v3(96.52,36.068)
  Bottom Layer w1.524: v10(48.26,68.707) v3(48.26,98.044) 48.26,99.822 50.038,101.6 J6.12@50.038,107.061
VDD12V: C18.2 C49.1 C52.2 C79.1 C86.2 C106.2 D1.2 D2.2 D12.2 D15.2 D17.2 D20.2 D21.2 DC1.1 J6.8 R60.2 R62.2 R93.2 R96.2 R121.2 RL1.2 RL2.2 RL3.2 RL4.2 RL5.2 U1.2 U1.7 | length 309.2
  Top Layer w0.508: R60.2@5.905,37.592 5.905,39.56 6.731,40.386 v2(14.351,40.386) ; C49.1@14.276,29.019 15.101,29.019 15.673,29.591 15.673,36.957 16.181,37.465 R62.2@16.954,37.465 ; C52.2@25.452,29.019 26.404,29.019 27.103,29.718 27.103,36.691 R96.2@28.003,37.592 ; C86.2@36.247,29.019 37.199,29.019 37.644,29.464 37.644,36.691 R93.2@38.672,37.719 ; C79.1@47.042,29.019 48.121,29.019 48.439,29.337 48.439,36.564 R121.2@49.466,37.592
  Top Layer w0.635: 23.368,54.737 U1.7@24.607,54.737
  Top Layer w0.762: U1.2@29.857,54.737 32.258,54.737 v3(32.639,55.118)
  Top Layer w0.8: D12.2@10.402,29.718 11.101,29.718 11.799,29.019 C49.1@14.276,29.019 RL1.2@14.276,26.416 ; 14.276,23.622 14.403,23.495 ; D15.2@21.324,29.718 22.277,29.718 22.975,29.019 C52.2@25.452,29.019 25.452,26.698 RL2.2@25.17,26.416 25.17,23.65 25.325,23.495 ; D20.2@32.5,29.718 33.834,29.718 34.532,29.019 C86.2@36.247,29.019 36.247,26.599 RL3.2@36.064,26.416 36.064,23.551 36.12,23.495 ; D17.2@43.041,29.718 43.74,29.019 C79.1@47.042,29.019 47.042,26.501 RL4.2@46.957,26.416 46.957,23.537 46.915,23.495 ; D21.2@53.963,29.718 55.043,29.718 55.741,29.019 C106.2@57.837,29.019 57.837,26.43 RL5.2@57.851,26.416 57.851,23.608 57.964,23.495
  Top Layer w0.889: v5(21.59,53.848) 22.479,53.848 23.368,54.737
  Top Layer w1.016: v8(33.782,66.167) v8(40.64,66.167)
  Top Layer w1.27: v9(17.209,55.054) 18.415,53.848 v5(21.59,53.848)
  Top Layer w1.524: 7.545,55.054 v9(17.209,55.054) 17.209,64.718 DC1.1@17.145,64.781 ; 14.276,23.622 RL1.2@14.276,26.416 ; 14.403,23.495 25.325,23.495 36.12,23.495 46.915,23.495 57.964,23.495
  Bottom Layer w1.016: v9(17.209,55.054) 17.209,62.039 21.336,66.167 v8(33.782,66.167) ; v8(40.64,66.167) 49.657,66.167 50.673,67.183 50.673,97.536 54.864,101.727 61.849,101.727 65.278,105.156 J6.8@65.278,107.061
  Bottom Layer w1.27: v5(21.59,53.848) 22.733,53.848 23.368,54.483 32.004,54.483 v3(32.639,55.118)
  Bottom Layer w1.524: RL1.2@14.276,26.416 14.276,45.772 17.145,48.641 ; 17.018,48.387 17.018,52.959 ; 17.018,53.213 v9@17.018,55.054
WDI: pad.0@49.403,51.308 R19.2 U3.35 U5.6 | length 31.5
  Top Layer w0.254: R19.2@48.121,52.637 49.582,51.177 U5.6@49.582,49.589 ; v1(68.58,44.577) 68.707,44.577 69.474,45.344 U3.35@72.306,45.344
  Bottom Layer w0.254: pad.0@49.403,51.308 49.403,48.26 53.161,44.502 68.505,44.502 v1(68.58,44.577)
XTAL1: C46.1 U3.31 Y2.2 | length 13.7
  Top Layer w0.254: Y2.2@62.536,51.054 Y2.2@62.536,50.8 62.536,48.387 63.579,47.344 63.933,46.99 66.346,46.99 ; C46.1@66.346,47.561 66.346,46.99 ; U3.31@72.306,47.344 70.764,47.344 70.41,46.99 66.346,46.99
XTAL2: C48.1 U3.33 Y2.1 | length 13.4
  Top Layer w0.254: Y2.1@62.536,42.418 62.536,45.72 63.171,46.355 66.346,46.355 66.346,46.291 66.398,46.344 U3.33@72.306,46.344
Y1-in: J9.1 R71.1 | length 8.7
  Top Layer w0.381: R71.1@62.166,11.176 62.166,9.08 62.801,8.445 64.834,8.445 J9.1@67.437,5.842
Y2-in: J9.3 R72.1 | length 11.3
  Top Layer w0.305: R72.1@67.501,11.176 67.501,9.461 68.707,8.255 73.533,8.255 75.057,6.731 J9.3@75.057,5.842
Y3-in: J9.5 R89.1 | length 13.1
  Top Layer w0.305: R89.1@73.215,11.049 73.215,9.97 75.057,8.128 81.788,8.128 82.677,7.239 J9.5@82.677,5.842
Y4-in: J9.7 R90.1 | length 14.9
  Top Layer w0.305: R90.1@79.184,11.049 79.184,9.588 79.883,8.89 88.519,8.89 90.297,7.112 J9.7@90.297,5.842
Y5-in: J9.9 R117.1 | length 16.4
  Top Layer w0.305: R117.1@84.772,11.176 84.772,10.223 85.344,9.652 89.916,9.652 91.821,7.747 96.901,7.747 97.917,6.731 J9.9@97.917,5.842
pads on no net: J12.5 MAKE1.1 MARKE1.1 MARKE3.1 RL6.8 RL6.9 RL6.10 U1.8 U3.2 U3.3 U3.5 U3.6 U3.8 U3.9 U3.10 U3.11 U3.12 U3.13 U3.16 U3.19 U3.20 U3.21 U3.26 U3.29 U3.32 U3.34 U3.45 U3.48 U3.49 U3.50 U3.51 U3.52 U3.55 U3.58 U3.66 U3.67 U3.68 U3.71 U3.74 U3.78 U3.81 U3.83 U3.84 U3.85 U3.88 U3.91 U3.92 U3.94 U3.97 U3.99 U3.100 U3.101 U3.104 U3.105 U3.108 U3.109 U3.110 U3.111 U3.112 U3.113 U3.115 U3.116 U3.120 U3.123 U3.124 U3.125 U3.126 U3.127 U3.128 U3.129 U3.131 U3.132 U3.133 U3.135 U3.136 U3.137 U3.140 U3.144 U5.5 U12.7 U12.8 U14.5 U14.6 U14.7 U15.5 U15.6 U15.7 Y1.3
copper on no net:
  other v1: 116.205,5.715

## Polygon pours and split planes (outlines as drawn)
FVGND on Top Layer "Top Layer-No Net" (solid, pour order 9): 128.016,49.403 156.845,49.403 158.115,48.133 158.115,45.72 158.115,15.367 157.353,14.605 156.972,14.224 154.559,14.224 136.144,14.224 135.382,14.986 132.715,17.653 132.715,18.034 132.715,28.956 128.143,33.528 124.714,36.957 124.714,40.005 124.714,48.387 125.73,49.403 128.143,49.403
SGND on Top Layer "Top Layer-No Net" (solid, pour order 10): 102.162,30.734 118.738,30.734 119.248,30.226 120.396,29.083 120.396,21.463 120.396,5.715 118.101,3.429 117.846,3.175 116.571,3.175 66.586,3.175 61.486,8.255 60.466,9.271 60.466,11.43 60.466,13.208 57.023,16.637 57.023,18.542 57.023,18.796 94.511,18.796 98.464,22.733 100.377,24.638 100.377,27.94 100.377,29.083 101.652,30.353 102.034,30.734 102.417,30.734
DGND on Top Layer "Top Layer-No Net" (solid, pour order 11): 4.445,90.805 4.445,104.267 9.271,109.093 9.779,109.601 16.51,109.601 27.94,109.601 28.067,109.474 29.854,107.687 29.854,106.866 29.854,100.594 30.761,99.688 31.894,99.688 46.983,99.688 47.879,100.584 47.886,100.591 47.886,107.486 50.001,109.601 50.8,109.601 76.581,109.601 77.343,108.839 77.343,106.636 77.343,106.045 76.073,104.775 71.501,100.203 71.501,90.16 71.501,82.55 73.787,80.264 77.978,80.264 146.304,80.264 148.793,77.775 148.971,77.597 148.971,77.089 148.971,56.515 145.796,53.34 142.748,53.34 121.666,53.34 120.142,51.816 118.237,49.911 118.237,47.625 118.237,38.443 118.237,38.227 116.967,36.957 114.3,36.957 100.838,36.957 100.076,36.195 96.901,33.02 96.901,28.956 96.901,26.035 95.504,24.638 93.98,23.114 92.456,23.114 7.366,23.114 4.445,26.035 4.445,26.985 4.445,91.567
FVGND on Bottom Layer "Top Layer-No Net" (solid, pour order 7): 125.73,49.403 132.08,49.403 156.845,49.403 158.115,48.133 158.115,44.704 158.115,15.367 157.861,15.113 156.972,14.224 156.718,14.224 136.144,14.224 134.747,15.621 132.842,17.526 132.715,17.653 132.715,25.527 132.715,28.956 130.429,31.242 124.714,36.957 124.714,39.751 124.714,48.387 125.73,49.403
DGND on Bottom Layer "Top Layer-No Net" (solid, pour order 8): 16.51,109.601 76.581,109.601 77.343,108.839 77.343,106.045 75.438,104.14 71.501,100.203 71.501,96.139 71.501,82.55 73.787,80.264 77.343,80.264 146.304,80.264 148.971,77.597 148.971,73.66 148.971,56.515 145.796,53.34 141.859,53.34 121.666,53.34 118.618,50.292 118.237,49.911 118.237,48.006 118.237,38.227 116.967,36.957 115.697,36.957 101.346,36.957 97.028,32.639 96.901,32.512 96.901,30.353 96.901,26.797 93.472,23.368 93.218,23.114 91.821,23.114 8.128,23.114 4.445,26.797 4.445,35.433 4.445,99.06 9.906,104.521 14.986,109.601 15.113,109.601 16.51,109.601
SGND on Bottom Layer "Top Layer-No Net" (solid, pour order 12): 103.692,30.734 118.738,30.734 120.013,29.464 120.396,29.083 120.396,21.463 120.396,5.842 117.846,3.302 117.718,3.175 114.403,3.175 66.586,3.175 65.821,3.937 60.466,9.271 60.466,10.541 60.466,13.208 57.406,16.256 57.023,16.637 57.023,18.796 58.298,18.796 66.331,18.796 94.511,18.796 99.484,23.749 100.377,24.638 100.377,28.956 100.377,29.083 102.034,30.734 103.692,30.734

## Keep-outs
Keep-Out Layer:
  lines w0.254: 0,3 0,109 ; 0,3.175 ccw(c3.175,3.175) 3.175,0 ; 0,108.458 cw(c3.365,108.648) 3.175,112.014 ; 3,0 156.473,0 ; 3,112 157,112 ; 156.54,-0.031 ccw(c156.474,3.495) 160,3.561 160,109 ; 156.591,112 cw(c156.66,108.629) 160.03,108.698

## Other copper
Top Layer:
  rectangle net DGND: 54.662,55.372 59.107,57.658

## Silkscreen, mask and mechanical layers (free items; w line width, h text height)
Top Overlay:
  circle w0.254: c5.033,106.934 r5
  circle w0.254: c155,107.061 r5
  circle w0.254: c5.033,5.08 r5
  circle w0.254: c155,4.953 r5
  lines w0.152: 23.063,69.875 23.063,70.815 23.139,70.891 ; 23.063,70.485 23.47,70.891 23.495,70.891 ; 23.114,70.231 23.749,70.866 ; 23.571,70.383 23.139,70.815 23.139,70.891 ; 24.079,70.891 23.139,70.891
  text "A1" at 99.366,104.648 h1.6
  text "B1" at 103.049,104.648 h1.6
  text "A1" at 106.859,104.648 h1.6
  text "B1" at 110.669,104.648 h1.6
  text "H1" at 130.194,104.648 h1.6
  text "L1" at 134.418,104.648 h1.6
  text "H1" at 137.968,104.648 h1.6
  text "L1" at 142.038,104.648 h1.6
  text "H2" at 114.882,104.521 h1.6
  text "L2" at 118.769,104.521 h1.6
  text "H2" at 122.657,104.521 h1.6
  text "L2" at 126.544,104.521 h1.6
  text "5V" at 48.693,104.394 h1.6
  text "RX1" at 52.58,104.394 h1.6
  text "TX1" at 56.468,104.394 h1.6
  text "G" at 60.355,104.394 h1.6
  text "12" at 63.933,104.394 h1.6
  text "RX2" at 67.437,104.394 h1.6
  text "TX2" at 71.299,104.394 h1.6
  text "G" at 75.363,104.394 h1.6
  text "A2" at 78.994,104.394 h1.6
  text "B2" at 82.931,104.394 h1.6
  text "A2" at 86.741,104.394 h1.6
  text "B2" at 90.599,104.394 h1.6
  text "CLK" at 15.367,103.505 h1.6
  text "IO" at 19.05,103.505 h1.6
  text "G" at 21.717,103.505 h1.6
  text "3.3" at 24.257,103.505 h1.6
  text "MT-CHARHER  V1.0.0" at 33.909,77.597 h2.8
  text "Rose" at 41.021,74.93 h2.8
  text "MOD" at 132.588,57.785 h2.8
  text "ISP" at 132.715,53.086 h2.8
  text "DO1" at 16.764,7.239 h2.8
  text "DO2" at 24.765,7.239 h2.8
  text "DO3" at 32.258,7.239 h2.8
  text "DO4" at 39.878,7.239 h2.8
  text "DO5" at 47.625,7.239 h2.8
  text "DO5" at 54.61,7.239 h2.8
  text "DI1" at 66.675,7.239 h2.4
  text "DI2" at 74.295,7.239 h2.4
  text "DI3" at 81.915,7.239 h2.4
  text "12V" at 128.143,7.239 h2.8
  text "G" at 133.096,7.239 h2.8
  text "DI4" at 89.027,6.985 h2.4
  text "DI5" at 97.536,6.985 h2.4
  text "EL" at 105.537,6.985 h2.4
  text "FG" at 136.652,6.985 h2.4
  text "CC" at 140.589,6.985 h2.4

## Text inside footprints (layer, text, board x,y; h text height)
DC1: Top Overlay "+" at 18.467,62.475 h0.8 r180
DC2: Top Overlay "+" at 18.467,70.032 h0.8 r180
DC9: Top Overlay "+" at 18.467,77.588 h0.8 r180
DC10: Top Overlay "+" at 59.488,65.396 h0.8 r180
DC11: Top Overlay "+" at 141.657,20.438 h0.8 r180
SW1: Top Overlay "ON" at 41.505,45.39 h0.8 r90
SW2: Top Overlay "ON" at 127.892,55.942 h0.8 r180
SW4: Top Overlay "ON" at 127.892,60.514 h0.8 r180